# Allegro board USBAUDIO_TEST_V10A.brd
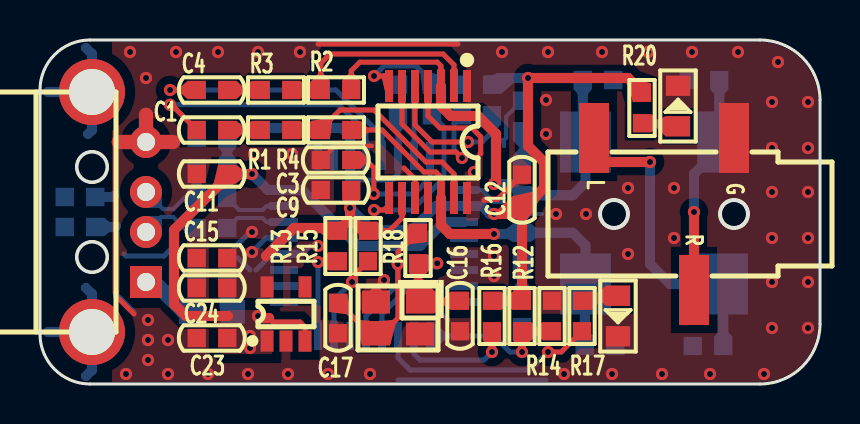
[diagram p0: board, top side]
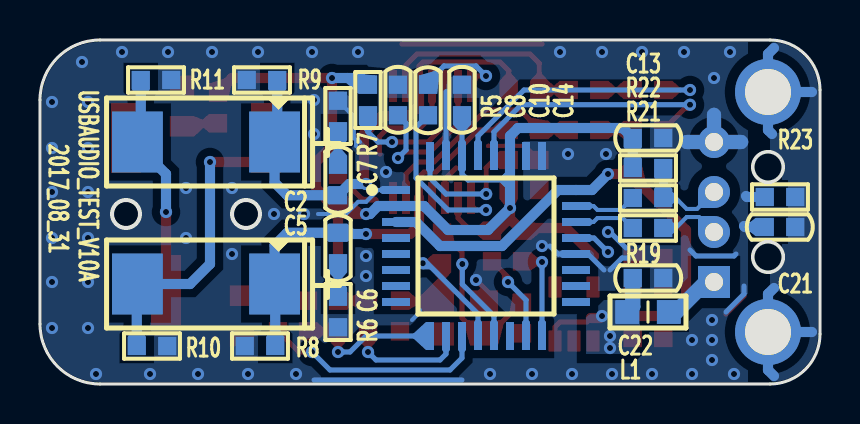
[diagram p1: board, bottom side, seen from below]

Outline 39 x 17.2 mm; copper layers: TOP, BOTTOM. Coordinates in mm from the lower left corner of the outline.
Outline path: 0,14.7 0,2.5 arc(0.73,0.73) 2.5,0 36,0 arc(38.12,0.88) 39,3 39,14.2 arc(38.12,16.32) 36,17.2 2.5,17.2 arc(0.73,16.47) 0,14.7

## Design rules (mm)
net group DP1: nets USBDM USBDP
net group DP3: nets DM DP

## Placement (name value [footprint] x y rotation side)
C1  10uF_50V  [CC0603]  8.6 12.7 180 top
C2  470uF_6V_7343  [CC7343_31]  30.7 12.1 0 bottom
C3  10uF_50V  [CC0603]  14.8 11.2 180 top
C4  10uF_50V  [CC0603]  8.6 14.7 180 top
C5  470uF_6V_7343  [CC7343_31]  30.7 5 0 bottom
C6  22nF_50V  [CC0603]  24.1 6.8 270 bottom
C7  22nF_50V  [CC0603]  24.1 10.2 90 bottom
C8  1uF_50V  [CC0603]  21.1 14.2 90 bottom
C9  0.1uF_50V  [CC0603]  14.8 9.7 180 top
C10  1uF_50V  [CC0603]  19.6 14.2 270 bottom
C11  0.1uF_50V  [CC0603]  8.6 10.5 180 top
C12  0.1uF_50V  [CC0603]  24.1 9.7 90 top
C13  0.1uF_50V  [CC0603]  8.6 12.3 180 bottom
C14  10uF_50V  [CC0603]  17.9 14.2 90 bottom
C15  10uF_50V  [CC0603]  8.6 6.3 180 top
C16  12pF_50V  [CC0603]  21 3.4 90 top
C17  12pF_50V  [CC0603]  14.9 3.3 90 top
C21  4.7nF_50V  [CC0603]  2 7.85 0 bottom
C22  10uF_50V  [CC0603]  8.6 5.3 180 bottom
C23  10uF_50V  [CC0603]  8.6 2.3 180 top
C24  10uF_50V  [CC0603]  8.6 4.8 180 top
D1  LED_GREEN  [LED0805]  28.9 3.4 270 top
D2  LED_GREEN  [LED0805]  31.9 13.9 90 top
J1  -  [USB-A-MALE]  5.3 5.1 180 top
L1  BEAD_BLM21PG600  [LC0805]  8.6 3.6 0 bottom
NOREF  -  []  0 0 90 top
NOREF#2  -  []  0 0 0 top
R1  10K  [RC0603]  11.8 12.7 0 top
R2  10K  [RC0603]  14.8 14.7 0 top
R3  10K  [RC0603]  11.8 14.7 0 top
R4  10K  [RC0603]  14.8 12.7 0 top
R5  100R  [RC0603]  22.6 14.2 270 bottom
R6  16R  [RC0603]  24.1 3.6 270 bottom
R7  16R  [RC0603]  24.1 13.4 90 bottom
R8  3.3K  [RC0603]  28 1.9 0 bottom
R9  3.3K  [RC0603]  27.9 15.2 0 bottom
R10  3.3K  [RC0603]  33.4 1.9 180 bottom
R11  3.3K  [RC0603]  33.2 15.2 180 bottom
R12  10K  [RC0603]  24.1 3.4 90 top
R13  10K  [RC0603]  14.9 6.9 270 top
R14  10K/NI  [RC0603]  25.6 3.4 90 top
R15  10K  [RC0603]  16.4 6.9 270 top
R16  10K  [RC0603]  22.6 3.4 90 top
R17  1K  [RC0603]  27.1 3.4 90 top
R18  1M  [RC0603]  18.9 6.8 270 top
R19  22R  [RC0603]  8.6 7.8 0 bottom
R20  1K  [RC0603]  30.1 13.8 90 top
R21  22R  [RC0603]  8.6 9.3 0 bottom
R22  1.5K  [RC0603]  8.6 10.8 0 bottom
R23  2.37M  [RC0603]  2 9.35 0 bottom
U1  -  [EARPHONE]  32.5 8.5 270 top
U2  APA2171  [TSSOP14]  19.4 12.1 180 top
U3  PCM2706CPJTR  [TQFP-32]  16.7 6.9 270 bottom
U4  SPX3819M5-L-3-3/TR  [SOT23-5]  12.3 3.5 0 top
Y1  X322512MOB4SI  [X-4P-3R2X2R5-SMD]  17.9 3.3 180 top

## Library data of the parts
C1 C3 C4 C6-C17 C21-C24 = CAP NP_2
C2 C5 = TMP_154254
D1 D2 = LED_4
J1 = USB-A-MALE
L1 = IND_BEAD_0805_600OHM_200MA
R1-R23 = R_Generic
U1 = EARPHONE
U2 = APA2171
U3 = PCM2706CPJTR
U4 = SPX3819M5-L-1-2
Y1 = X322525MOB4SI

## Footprints (pads in the part's own frame, mm; a bottom-side part is the same pattern mirrored in y, then rotated)
CC0603
  rect 0.914x0.914 smd: 1(-0.762,0) 2(0.762,0)
CC7343_31
  rect 2.54x3.048 smd: 1(-3.429,0) 2(3.429,0)
EARPHONE
  rect 3.5x1.5 smd: 1(3.8,0.2) 2(-3.8,-4.8) 3(-3.8,2.2)
LC0805
  rect 1.194x1.194 smd: 1(-1.041,0) 2(1.041,0)
LED0805
  rect 1.016x1.219 smd: 1(-1.016,0) 2(1.016,0)
RC0603
  rect 0.914x0.914 smd: 1(-0.762,0) 2(0.762,0)
SOT23-5
  rect 0.65x1.06 smd: 1(-0.95,-1.354) 2(0,-1.354) 3(0.95,-1.354) 4(0.95,1.354) 5(-0.95,1.354)
TQFP-32
  rect 0.4x1.4 smd: 1(-2.8,-4.5) 2(-2,-4.5) 3(-1.2,-4.5) 4(-0.4,-4.5) 5(0.4,-4.5) 6(1.2,-4.5) 7(2,-4.5) 8(2.8,-4.5) 17(2.8,4.5) 18(2,4.5) 19(1.2,4.5) 20(0.4,4.5) 21(-0.4,4.5) 22(-1.2,4.5) 23(-2,4.5) 24(-2.8,4.5)
  rect 1.4x0.4 smd: 9(4.5,-2.8) 10(4.5,-2) 11(4.5,-1.2) 12(4.5,-0.4) 13(4.5,0.4) 14(4.5,1.2) 15(4.5,2) 16(4.5,2.8) 25(-4.5,2.8) 26(-4.5,2) 27(-4.5,1.2) 28(-4.5,0.4) 29(-4.5,-0.4) 30(-4.5,-1.2) 31(-4.5,-2) 32(-4.5,-2.8)
TSSOP14
  rect 0.4x1.6 smd: 1(-1.95,-2.8) 2(-1.3,-2.8) 3(-0.65,-2.8) 4(0,-2.8) 5(0.65,-2.8) 6(1.3,-2.8) 7(1.95,-2.8) 8(1.95,2.8) 9(1.3,2.8) 10(0.65,2.8) 11(0,2.8) 12(-0.65,2.8) 13(-1.3,2.8) 14(-1.95,2.8)
USB-A-MALE
  rect 1.6x1.6 hole 0.9: 1(0,0)
  round 1.6 hole 0.9: 2(0,-2.5) 3(0,-4.5) 4(0,-7)
  round 3.3 hole 2.3: 5(2.7,2.5) 6(2.7,-9.5)
X-4P-3R2X2R5-SMD
  rect 1.4x1.15 smd: 1(-1.1,-0.8) 2(1.1,-0.8) 3(1.1,0.8) 4(-1.1,0.8)

## Nets
GND: C3.2 C8.2 C9.2 C11.2 C12.2 C13.2 C14.2 C15.2 C16.1 C17.1 C21.2 C22.2 C23.2 C24.2 D1.2(CATHODE) D2.2(CATHODE) J1.4(GND) R6.2 R7.2 R8.2 R9.2 R10.2 R11.2 R14.2 R23.2 U1.3(G) U2.1(RINP) U2.4(GND) U2.10(PGND) U2.14(LINP) U3.1(PGND) U3.20(DGND) U3.25(ZGND+) U3.26(AGNDL) U3.31(AGNDR) U4.2(GND) Y1.2(GND1) Y1.4(GND2)
GND_EARTH: C21.1 J1.5(SHLD1) J1.6(SHLD2) R23.1
VCC-USB: J1.1(VBUS) L1.1(A)
VCC_3.3V: C9.1 C12.1 C13.1 C14.1 C15.1 C24.1 R5.1 R12.2 R13.1 R15.1 R16.2 R20.2 R22.2 U2.9(VDD) U3.2(VCCP) U3.21(VDD) U3.27(VCCL) U3.30(VCCR) U4.5(VOUT)
VCC_5V: C11.1 C22.1 C23.1 L1.2(B) U3.3(HOST) U3.24(VBUS) U4.1(VIN) U4.3(EN)
DM: J1.2(D-) R19.1
DP: J1.3(D+) R21.1 R22.1
DT: R15.2 U3.15(DT)
I2S_BCK: U3.19(FUNC1)
I2S_DIN: U3.4(FUNC3)
I2S_DOUT: U3.17(DOUT)
I2S_LRCK: U3.5(FUNC0)
I2S_SYSCK: U3.18(FUNC2)
LOUT: C5.1 C6.1 R4.2 R8.1 U2.12(LOUT)
MC: U3.7(HID1/MC)
MD: U3.8(HID2/MD)
MS: U3.6(HID0/MS)
PSEL: R13.2 U3.16(PSEL)
ROUT: C2.1 C7.1 R2.2 R9.1 U2.3(ROUT)
USBDM: R19.2 U3.22(D-)
USBDP: R21.2 U3.23(D+)
VCOM: C3.1 U3.32(VCOM)
VOUTL: C1.2 U3.28(VOUTL)
VOUTR: C4.2 U3.29(VOUTR)
XIN: C16.2 R18.2 U3.12(XTI) Y1.1(X1)
XOUT: C17.2 R18.1 U3.13(XTO) Y1.3(X2)
N16934906: D2.1(ANODE) R20.1
N16966579: R12.1 R14.1 U3.9(FSEL)
N16966990: R16.1 U3.10(TEST)
N16967239: D1.1(ANODE) R17.2
N16967242: R17.1 U3.11(S\S\P\E\N\D\)
N16971646: C4.1 R3.1
N16971677: C1.1 R1.1
N16973067: C10.2 U2.8(CPP)
N16973070: C10.1 U2.7(CPN)
N16973073: R2.1 R3.2 U2.2(RINN)
N16973107: R1.2 R4.1 U2.13(LINN)
N16973856: C8.1 U2.6(VSS)
N16974592: R5.2 U2.5(S\D\N\)
N16975777: C2.2 R11.1 U1.1(R)
N16975780: C5.2 R10.1 U1.2(L)
N169687501: C6.2 R6.1
N169689791: C7.2 R7.1

Pads without a net: U2 11; U3 14; U4 4

## Via types
v1: diameter 0.61, hole 0.305, TOP to BOTTOM, 83 vias

## Routing (per net, layer and track width the routed paths; a pad name or vN(x,y) marks a point on that pad's centre or on a via; arc(x,y) is an arc through that point)
GND: length 61
  TOP w0.203: C3.2 14.75,11.91 16.59,11.91 16.6,11.9
  TOP w0.254: 22.54,9.23 22.5,9.2 22.2,9.2 22.23,9.23 22.54,9.23 ; 22.54,9.23 22.87,9.23 C12.2 ; U2.4 19.4,13.4 20,12.8 21.6,12.8 22.04,12.36 22.04,11.54 22,11.5 ; v1(17.2,5.2) 16.8,4.8 Y1.2 ; 4.7,3.5 3.8,4.4 3.8,4.6 ; 18.2,10.8 18.75,10.25 U2.10 ; 13.9,17 20.9,17
  TOP w0.711: J1.4 5.3,13.46 ; J1.4 3.94,12.1 ; J1.4 6.66,12.1
  BOTTOM w0.203: 23.2,12.2 23.1,12.2 23,12.1 ; 23.2,12.2 23.2,11.9 ; 23.2,12.2 23.31,12.31 23.31,13.37 R7.2 ; U3.1 22.1,9.7 22.69,9.11 23.09,9.11 23.7,8.5 25.1,8.5 ; 20,3.7 20,3.6 20.4,3.2
  BOTTOM w0.254: 10.8,5.7 11.6,6.5 U3.20 13.1,6.5 13.5,6.9 ; 6.5,6.7 6.2,6.4 4.3,6.4 4.2,6.5 ; 10.5,5.7 9.9,6.3 9.6,6.3 ; 9.7,6.8 10.5,7.6 v1(10.6,7.6) ; 3.8,4.9 3.8,4.5 4.7,3.6 ; U3.31 18.7,14.61 ; 17.9,0.2 25.3,0.2
  BOTTOM w0.508: C21.2 3.75,7.85 3.8,7.9 ; R23.2 3.65,9.35 3.7,9.4
  BOTTOM w0.711: J1.4 6.66,12.1 ; J1.4 5.3,13.46 ; J1.4 3.94,12.1
  vias: v1(4.3,0.5) v1(4.5,16.6) v1(5.3,15.3) v1(5.4,3.2) v1(5.4,2.2) v1(5.4,1.2) v1(6.4,2.2) v1(6.4,0.5) v1(6.8,16.6) v1(8.4,0.5) v1(8.9,16.6) v1(10.4,0.5) v1(10.7,11.5) v1(10.9,16.6) v1(12.4,0.5) v1(12.6,11.5) v1(13,16.6) v1(13.9,6.9) v1(14.4,0.5) v1(16.5,0.5) v1(21.7,10.6) v1(22.7,6.4) v1(22.7,5.4) v1(23.1,16.6) v1(25.3,14.2) v1(25.3,12.5) v1(25.4,16.6) v1(25.8,8.5) v1(26.2,0.5) v1(27.3,8.5) v1(28.1,16.6) v1(28.6,0.5) v1(29.4,9.8) v1(29.4,6.5) v1(30.4,16.6) v1(31.1,0.5) v1(31.7,9.8) v1(31.7,7.3) v1(32.6,16.6) v1(33.5,0.5) v1(34.9,16.6) v1(36.2,0.5) v1(36.6,14.1) v1(36.6,11.8) v1(36.6,9.6) v1(36.6,7.3) v1(36.6,5.1) v1(36.6,2.8) v1(36.9,16.1) v1(38.4,14.1) v1(38.4,11.8) v1(38.4,9.6) v1(38.4,7.3) v1(38.4,5.1) v1(38.4,2.8)
GND_EARTH: length 13.6
  BOTTOM w0.508: J1.5 2.6,4.5 2.3,4.8 ; J1.5 0.4,2.6 ; J1.5 2.6,0.7 2.3,0.4 ; J1.6 2.6,12.7 2.4,12.5 ; J1.6 2.6,16.5 2.3,16.8 ; J1.6 0.4,14.6
VCC-USB: length 2.9
  BOTTOM w0.762: J1.1 5.7,5.1 7.2,3.6 L1.1
VCC_3.3V: length 61.1
  TOP w0.254: U2.9 18.1,8.3 17.46,7.66 R15.1
  TOP w0.508: C9.1 15.5,9.64 v1(15.5,8.8) 15.5,8.3 ; R15.1 16.14,7.66 15.5,8.3 ; C12.1 24.34,8.94 25.2,9.8 25.2,11.1 24.4,11.9 v1(24.4,15.3) 29.4,15.3 30.1,14.6 R20.2 ; C12.1 R12.2 R16.2 ; C12.1 23.66,8.5 v1(22.7,8.5) ; 15.5,8.3 15.5,8.26 R13.1 14.76,7.8 12.7,7.8 11.3,6.4
  BOTTOM w0.254: U3.21 11.3,7.3 v1(10.6,6.6) ; 15.5,10.2 17.6,10.2 17.9,10.5 U3.30 C14.1
  BOTTOM w0.508: v1(22.7,8.5) 22.5,8.5 22.1,8.9 U3.2 19.8,8.9 18.6,7.7 16.6,7.7 v1(15.5,8.8) U3.27 15.5,12.4 15.1,12.8 9.86,12.8 C13.1 R22.2 ; R5.1 22.94,15.3 v1(24.4,15.3)
VCC_5V: length 29.5
  TOP w0.254: U4.3 13.25,2.85 13,3.1 11.66,3.1 11.46,3.3
  TOP w0.508: v1(10.9,3.4) 11,3.3 11.46,3.3 ; 9.4,3.4 7.3,3.4 6.7,4 6.7,7.7 9.36,10.36 C11.1 v1(10.6,10.5)
  BOTTOM w0.508: v1(10.6,10.5) 11.4,9.7 U3.24 13.1,9.7 15.9,6.9 19,6.9 20.2,8.1 U3.3
  BOTTOM w0.762: C22.1 9.36,3.88 L1.2
  vias: v1(10.5,2.4) v1(10.5,1.8)
DM: length 3.1
  BOTTOM w0.203: R19.1 7.21,7.8 6.66,8.35 6.05,8.35 J1.2
DP: length 4.6
  BOTTOM w0.203: R22.1 R21.1 7.21,9.3 6.66,8.75 6.15,8.75 J1.3
DT: length 4.4
  TOP w0.254: R15.2 15.6,5.34 v1(15.6,5.1)
  BOTTOM w0.254: v1(15.6,5.1) 14.7,4.2 U3.15
LOUT: length 20.6
  TOP w0.254: U2.12 20.05,10.35 19.8,10.6 19.2,10.6 17.1,12.7 R4.2
  TOP w0.508: v1(22.7,7.5) 20.5,7.5 20.05,7.95 U2.12
  BOTTOM w0.508: R8.1 27.24,4.97 C5.1 27.27,6.93 26.64,7.56 C6.1 24.04,7.5 v1(22.7,7.5)
PSEL: length 4.7
  TOP w0.254: v1(13.9,6.1) 14.86,6.1 R13.2
  BOTTOM w0.254: U3.16 v1(13.9,6.1)
ROUT: length 23.8
  TOP w0.254: U2.3 20.05,15.9 19.86,16.09 15.99,16.09 15.56,15.66 R2.2
  TOP w0.508: U2.3 20.05,13.9 20.55,13.4 21.9,13.4 22.8,12.5 22.8,10.1 v1(22.7,10)
  BOTTOM w0.508: R9.1 27.14,12.23 C2.1 27.27,10.07 26.64,9.44 C7.1 23.54,10 v1(22.7,10)
USBDM: length 3.1
  BOTTOM w0.203: U3.22 11.32,8.1 11.13,8.3 9.86,8.3 R19.2
USBDP: length 3.2
  BOTTOM w0.203: R21.2 9.96,8.7 11.13,8.7 11.32,8.9 U3.23
VCOM: length 6.8
  TOP w0.254: v1(16.69,9.5) 16.69,10.81 16.3,11.2 C3.1
  BOTTOM w0.254: v1(16.69,9.5) 18.7,9.5 19.5,10.3 U3.32
VOUTL: length 13.4
  TOP w0.254: C1.2 6.57,13.96 v1(6.5,13.96)
  BOTTOM w0.254: U3.28 16.3,12.6 14.94,13.96 v1(6.5,13.96)
VOUTR: length 13.9
  TOP w0.254: v1(6.5,14.7) C4.2
  BOTTOM w0.254: U3.29 17.1,12.4 14.8,14.7 v1(6.5,14.7)
XIN: length 9.9
  TOP w0.254: C16.2 20.94,4.1 Y1.1 18.9,4.2 R18.2 v1(19.86,6.04)
  BOTTOM w0.254: v1(19.86,6.04) 19.64,6.04 17.1,3.5 U3.12
XOUT: length 12.9
  TOP w0.254: R18.1 18.86,7.56 17.9,6.6 17.9,6.02 v1(17.88,6) 17.9,5.98 17.9,3.3 17.1,2.5 Y1.3 16.5,2.5 14.94,4.06 C17.2
  BOTTOM w0.254: v1(17.88,6) 17.88,4.98 16.3,3.4 U3.13
N16934906: length 1.9
  TOP w0.254: R20.1 31.75,13.04 D2.1
N16966579: length 7.5
  TOP w0.254: R14.1 R12.1 v1(24.1,1.6)
  BOTTOM w0.254: U3.9 22.7,2.4 23.5,1.6 v1(24.1,1.6)
N16966990: length 6.1
  TOP w0.254: v1(22.6,1.6) R16.1
  BOTTOM w0.254: U3.10 18.7,1.5 19,1.2 22.2,1.2 v1(22.6,1.6)
N16967239: length 1.9
  TOP w0.254: D1.1 27.35,4.42 R17.2
N16967242: length 11.4
  TOP w0.254: R17.1 26.06,1.6 v1(25.4,1.6)
  BOTTOM w0.254: U3.11 17.9,1.3 18.5,0.7 24.5,0.7 v1(25.4,1.6)
N16971646: length 1.7
  TOP w0.254: C4.1 R3.1
N16971677: length 1.7
  TOP w0.254: C1.1 R1.1
N16973067: length 8.8
  TOP w0.254: U2.8 17.45,8.95 17.2,8.7 v1(16.7,8.7)
  BOTTOM w0.254: C10.2 20.2,12.84 20.2,10.3 18.6,8.7 v1(16.7,8.7)
N16973070: length 4.7
  TOP w0.254: v1(16.7,15.4) 17.2,15.4 17.45,15.15 U2.7
  BOTTOM w0.254: C10.1 19.6,15.1 18.8,15.9 17.2,15.9 v1(16.7,15.4)
N16973073: length 10.9
  TOP w0.254: U2.2 20.7,15.95 20.15,16.5 14.5,16.5 14.04,16.04 R2.1 R3.2
N16973107: length 11.1
  TOP w0.254: R1.2 R4.1 14.04,12.74 15,13.7 16.7,13.7 19.3,11.1 20.1,11.1 20.7,10.5 U2.13
N16973856: length 8.1
  TOP w0.254: U2.6 18.1,13 19.5,11.6 20.8,11.6 v1(21.1,11.3)
  BOTTOM w0.254: v1(21.1,11.3) 20.7,11.7 20.7,13.04 C8.1
N16974592: length 7.2
  TOP w0.254: U2.5 18.75,12.95 19.6,12.1 v1(21.4,12.1)
  BOTTOM w0.254: R5.2 22.6,12.6 22.1,12.1 v1(21.4,12.1)
N16975777: length 11.2
  TOP w0.508: v1(32.7,8.6) U1.1
  BOTTOM w0.508: v1(32.7,8.6) 32.7,10.5 34.13,11.93 C2.2 33.96,12.27 R11.1
N16975780: length 16
  TOP w0.508: v1(30.5,11.1) 28.21,11.1 27.7,11.61 U1.2
  BOTTOM w0.508: R10.1 34.16,4.97 C5.2 31.5,5 30.5,6 v1(30.5,11.1)
N169687501: length 1.7
  BOTTOM w0.254: C6.2 R6.1
N169689791: length 1.7
  BOTTOM w0.254: C7.2 R7.1

## Copper pours and planes (outline as drawn; the poured copper is in the pictures)
GND_EARTH on BOTTOM: 2.5,0.1 0.8,0.8 0.1,2.5 0.1,14.7 0.8,16.4 2.5,17.1 2.5,10.2 1.6,10.2 1.6,7 2.5,7
VCC_3.3V on TOP: 8.9,4.3 11.7,4.3 11.7,6.2 11.1,6.8 8.9,6.8
VCC_5V on TOP: 8.9,3.2 8.9,1.8 9.2,1.5 11.6,1.5 11.6,3.2 11.1,3.7 9.4,3.7
VCC_5V on BOTTOM: 9,4.2 9,2 9.5,1.5 11.7,1.5 11.7,3.3 10.8,4.2
XOUT on TOP (solid shape): 17.5,3.08 16.83,2.48 16.1,1.93 15.8,3.06 15.83,3.16 15.93,3.2
XOUT on TOP (solid shape): 17.68,3.2 17.77,3.16 17.8,3.06 17.5,1.93 16.77,2.48 16.1,3.08
GND on TOP: 3.6,17.1 36,17.1 38.05,16.25 38.9,14.2 38.9,3 38.06,0.94 36,0.1 3.6,0.1 ; 1 cut-out
GND on BOTTOM: 3.6,17.1 36,17.1 38.05,16.25 38.9,14.2 38.9,3 38.06,0.94 36,0.1 3.6,0.1
VCC_3.3V on TOP (solid shape): 14.96,7.65 14.44,7.2 13.88,7.67 13.85,7.84 13.93,7.99 14.44,8.12
VCC_3.3V on TOP (solid shape): 29.39,15.06 29.47,15.24 29.65,15.31 30.56,15.02 30.14,14.52 29.64,14.1
VCC_3.3V on TOP (solid shape): 24.8,9.65 25,9.55 25.04,9.33 24.56,8.48 24.05,8.9 23.64,9.4
VCC_3.3V on TOP (solid shape): 24.16,8.96 24.56,8.48 23,8.25 22.78,8.38 22.8,8.65 23.64,9.4
VCC_3.3V on BOTTOM (solid shape): 23.62,15.55 23.83,15.41 23.81,15.16 23.06,14.5 22.54,14.94 22.14,15.42
VCC_5V on TOP (solid shape): 9.4,10.55 9.82,10.04 8.94,9.65 8.74,9.71 8.65,9.9 8.9,10.96
XIN on TOP (solid shape): 20.25,4.18 20.27,4.1 20.25,4.02 19.7,3.53 18.97,4.1 19.7,4.68
XIN on TOP (solid shape): 18.81,5.4 18.89,5.44 18.98,5.41 19.7,4.68 19,4.07 18.3,4.68
XOUT on TOP (solid shape): 15.52,3.61 15.49,3.52 15.4,3.48 14.44,3.6 14.88,4.08 15.36,4.52
XOUT on TOP (solid shape): 18.92,7.58 19.36,7.1 18.4,6.98 18.31,7.02 18.28,7.11 18.44,8.02
N16934906 on TOP (solid shape): 31.93,12.88 31.29,12.38 30.66,12.96 30.63,13.06 30.69,13.14 31.29,13.39
N16966579 on BOTTOM (solid shape): 20.37,2.48 20.4,2.4 20.37,2.32 19.7,1.7 19.47,2.4 19.7,3.1
N16967239 on TOP (solid shape): 28.93,4.42 28.29,3.91 27.81,4.34 27.78,4.42 27.81,4.49 28.29,4.92
N16967239 on TOP (solid shape): 28.18,4.54 28.26,4.45 28.24,4.34 27.56,3.7 27.07,4.15 27.56,4.62
N16973070 on BOTTOM (solid shape): 19.02,15.56 19.06,15.65 19.16,15.68 20.06,15.42 19.62,14.94 19.14,14.5
N16973107 on TOP (solid shape): 14.49,13.32 14.58,13.29 14.62,13.2 14.5,12.24 14.02,12.68 13.58,13.16

Small or netless copper shapes (teardrops, artwork), in the pictures only: 56 on TOP, 56 on BOTTOM

## Text on the board
Ref Des/Silkscreen Bottom: USBAUDIO_TEST_V10A | 2017_08_31
DIMENSION: FIGURE | SIZE | 0.3048 | 0.9 | 2.3 | DRILL CHART: TOP to BOTTOM | ALL UNITS ARE IN MILLIMETERS | PLATED | QTY | 83 | 4 | 2
